# Altium PCB USB_keyholder.PcbDoc
Units mm, origin at the board's own origin, x right, y up, seen from the top; angles counter-clockwise.
Board outline 41.6 x 15.6 mm, 2 copper layers (Top Layer, Bottom Layer), stack 1.571 mm thick; 46 components, 41 nets, 205 pads, 36 vias.
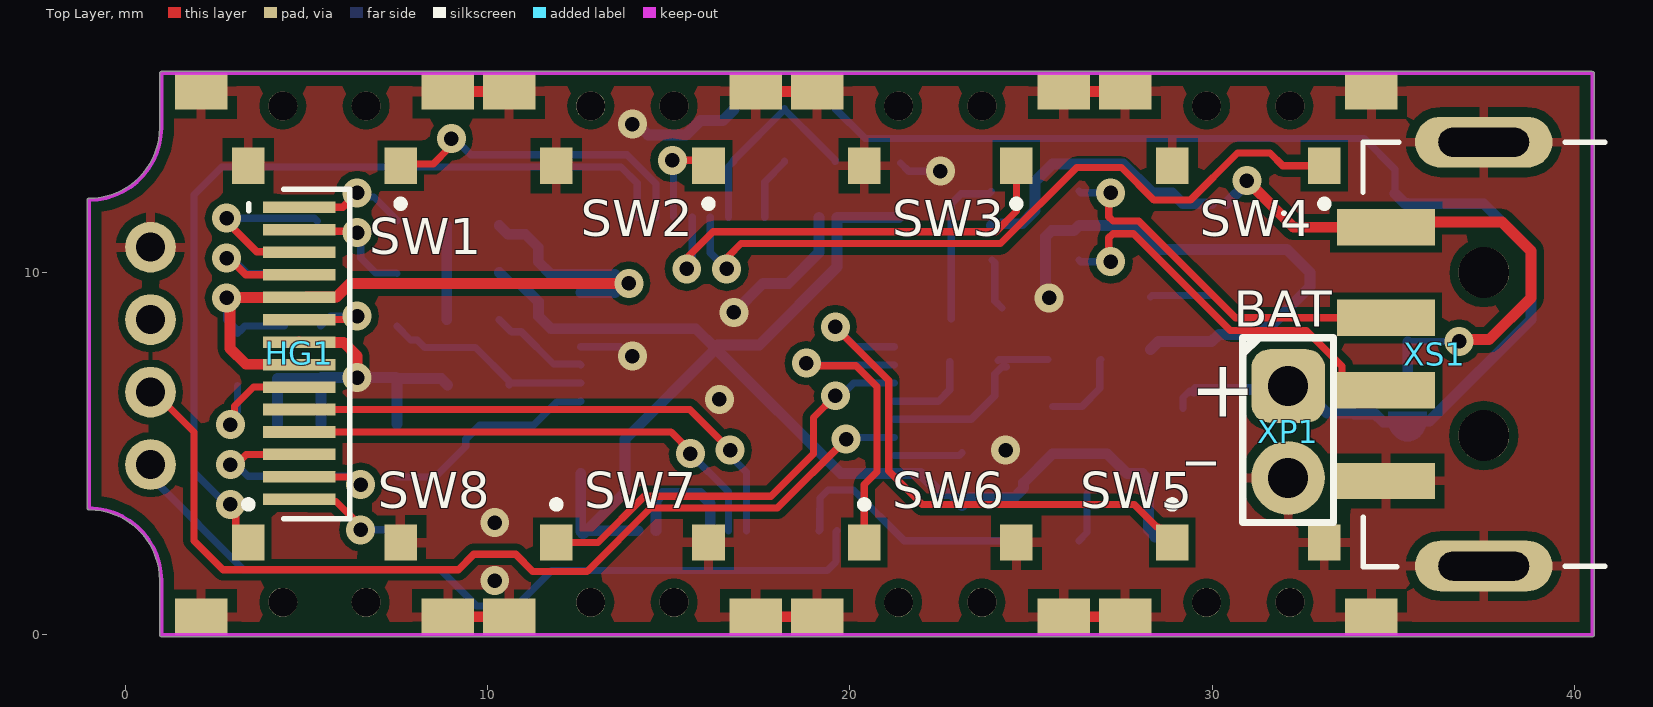
[diagram p0: Top Layer view]
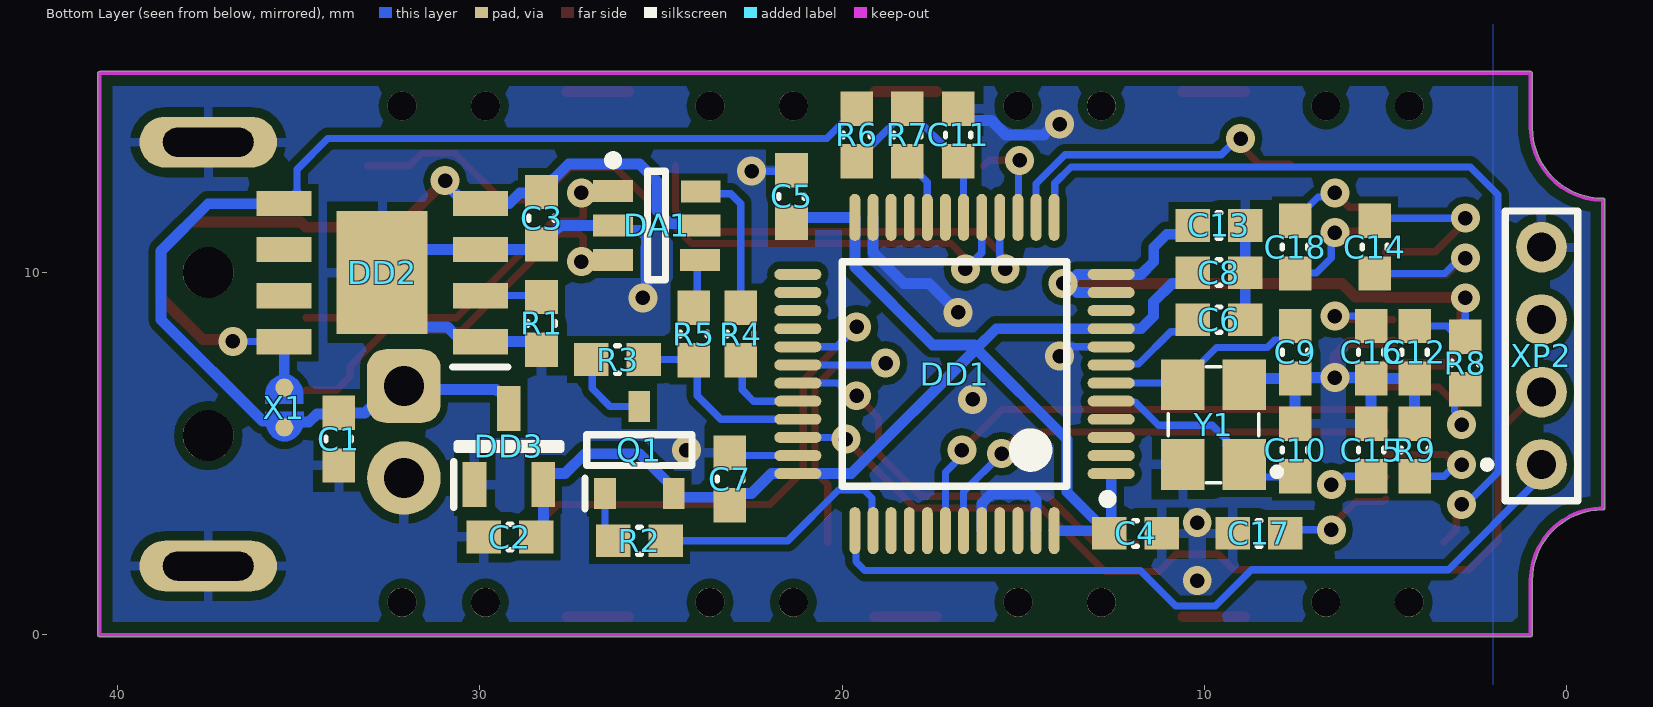
[diagram p1: Bottom Layer view, seen from below]
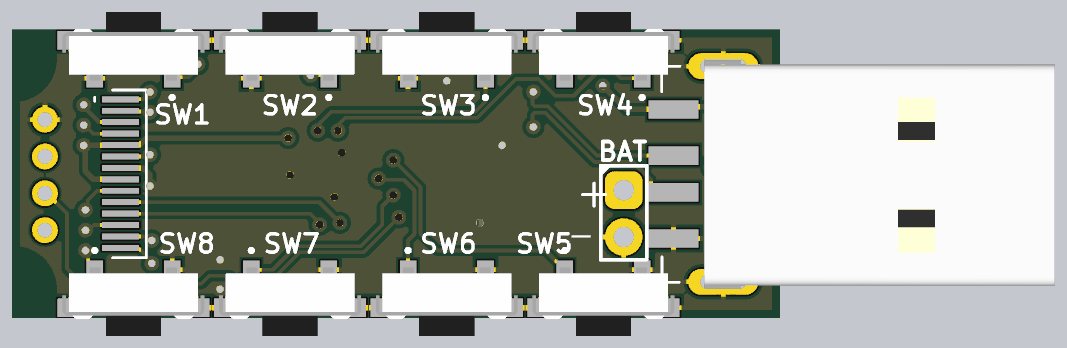
[diagram p2: 3D render of the assembled board from above, using the file's embedded part models]
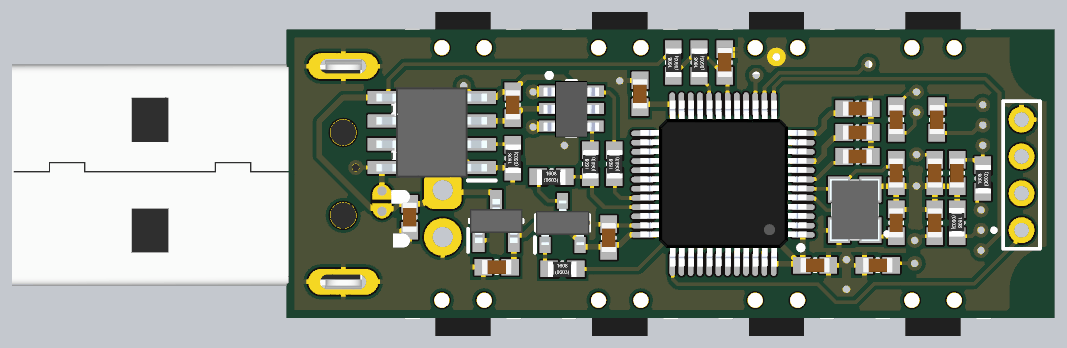
[diagram p3: 3D render of the assembled board from below, using the file's embedded part models]

## Layer stack, top to bottom
Top Solder: solder mask 0.0102, Solder Resist, Dk 3.5
Top Layer: signal copper 0.0356
Dielectric 1: dielectric 1.5, FR-4, Dk 4.8
Bottom Layer: signal copper 0.0356
Bottom Solder: solder mask 0.0102, Solder Resist, Dk 3.5

## Board outline
-0.999,3.45 cw(c-0.999,3.45) -0.999,3.45 cw(c-1,3.5) -1.036,3.464 cw(c-1,3.5) -1.05,3.501 -1.05,12 cw(c-1,12) -1,12.05 ccw(c-1,14) 0.95,14 0.95,15.5 cw(c1,15.5) 1.001,15.55 40.5,15.55 cw(c40.5,15.5) 40.55,15.5 40.55,0 cw(c40.5,0) 40.5,-0.05 1.002,-0.05 cw(c1,0) 0.95,0 0.95,1.5 ccw(c-1,1.5)

## Design rules (kind name [scope] priority, off if disabled: settings)
BoardOutlineClearance [All] p1: gap=0.4 ignorepadtopadclearanceinfootprint=FALSE
Clearance [All] p1: gap=0.2 ignorepadtopadclearanceinfootprint=FALSE except(0.125: Arc-Arc Arc-Track Arc-SMDPad Arc-THPad Arc-Via Arc-Text Track-Track Track-SMDPad Track-THPad Track-Via Track-Text SMDPad-Via SMDPad-Text THPad-THPad THPad-Via THPad-Text Via-Via Via-Text Fill-Text Poly-Text Region-Text Text-Text; 0.25: Arc-Hole Track-Hole SMDPad-Hole THPad-Hole Via-Hole Fill-Hole Poly-Hole Region-Hole Text-Hole)
ComponentClearance [All] p1: gap=0 collisioncheckmode=3 verticalgap=0.254 showdistances=FALSE
DiffPairsRouting [All] p1: maxlimit=0.254 minlimit=0.15 mostfreqgap=0.254 toplayer_minwidth=0.2 toplayer_maxwidth=0.381 toplayer_prefwidth=0.254 bottomlayer_minwidth=0.2 bottomlayer_maxwidth=0.381 bottomlayer_prefwidth=0.254 maxuncoupledlength=12.7
HoleSize [All] p1: absolutevalues=TRUE maxlimit=100 minlimit=0.3 maxpercent=80.000 minpercent=20.000
MinimumAnnularRing [All] p1: minimumring=0.15
MinimumSolderMaskSliver [All] p1: minsoldermaskwidth=0.15
PolygonConnect [All] p1: thpad.connectstyle=Relief thpad.reliefconductorwidth=0.254 thpad.reliefentries=4 thpad.polygonreliefangle="90 Angle" thpad.airgapwidth=0.254 smdpad.connectstyle=Relief smdpad.reliefconductorwidth=0.254 smdpad.reliefentries=4 smdpad.polygonreliefangle="90 Angle" smdpad.airgapwidth=0.254 via.connectstyle=Direct via.reliefconductorwidth=0.254 via.reliefentries=4 via.polygonreliefangle="90 Angle" via.airgapwidth=0.254
RoutingVias [All] p1: holewidth=0.4 width=0.8 viastyle="Through Hole" minholewidth=0.3 minwidth=0.8 maxholewidth=0.8 maxwidth=1.27
SilkToSilkClearance [All] p1 off: silktosilkclearance=0.15
SilkToSolderMaskClearance [IsPad] p1: minsilkscreentomaskgap=0.1 clearancetoexposedcopper=TRUE
SolderMaskExpansion [All] p1: expansion=0.102 istentingtop=FALSE
Width [All] p1: maxlimit=1 minlimit=0.125 preferedwidth=0.254
24 further rules are at their usual default settings.

## Classes and differential pairs
differential pair USB: +USB_P -USB_N
differential pair USB2: +USB2_P -USB2_N
differential pair USB1: +USB1_P -USB1_N

## Components (designator, comment, footprint, x,y, rotation, side; value= is the part's Value field where it differs from the comment)
C1 "1 мк" C_0603 33.9,5.4 r90 bottom value=1µF
C2 "1 мк" C_0603 29.175,2.7 r180 bottom value=1µF
C3 "0,1 мк" C_0603 28.3,11.5 r90 bottom value=0.1µF
C4 "0,1 мк" C_0603 11.9,2.8 r0 bottom value=0.1µF
C5 "0,1 мк" C_0603 21.4,12.1 r270 bottom value=0.1µF
C6 "0,1 мк" C_0603 9.6,8.7 r0 bottom value=0.1µF
C7 "0,1 мк" C_0603 23.1,4.3 r270 bottom value=0.1µF
C8 "0,1 мк" C_0603 9.6,10 r0 bottom value=0.1µF
C9 "20" C_0603 7.5,7.8 r90 bottom value=20pF
C10 "20" C_0603 7.5,5.1 r270 bottom value=20pF
C11 "10 мк" C_0603 16.8,13.8 r270 bottom value=10µF
C12 "0,1 мк" C_0603 4.2,7.8 r270 bottom value=0.1µF
C13 "0,1 мк" C_0603 9.6,11.3 r0 bottom value=0.1µF
C14 "1 мк" C_0603 5.3,10.7 r90 bottom value=1µF
C15 "10 мк" C_0603 5.4,5.1 r270 bottom value=10µF
C16 "1 мк" C_0603 5.4,7.8 r270 bottom value=1µF
C17 "10 мк" C_0603 8.5,2.8 r180 bottom value=10µF
C18 "1 мк" C_0603 7.5,10.7 r90 bottom value=1µF
DA1 "USBLC6-2SC6" SOT-23-6 25.1,11.3 r180 bottom
DD1 "STM32f103c8t6" LQFP48 16.9,7.2 r0 bottom
DD2 "TP4056" SOIC127P600X175-9N 32.7,10 r0 bottom
DD3 "MCP1700T-3002E_TT" SOT95P237X112-3N 29.2,5.2 r90 bottom
HG1 "SSD1306_128х64_OLED" 14_pin_OLED 4.8,11.8 r180 top
Q1 "MMBT5401-7-F" SOT95P240X120-3N 25.6,5.1 r90 bottom
R1 "10 к" R_0603 28.3,8.6 r90 bottom
R2 "1,5 к" R_0603 25.6,2.6 r180 bottom
R3 "1,5 к" R_0603 26.2,7.6 r180 bottom
R4 "22" R_0603 22.8,8.3 r90 bottom
R5 "22" R_0603 24.1,8.3 r90 bottom
R6 "1 M" R_0603 19.6,13.8 r90 bottom
R7 "1 M" R_0603 18.2,13.8 r90 bottom
R8 "10 к" R_0603 2.8,7.5 r90 bottom
R9 "390 к" R_0603 4.2,5.1 r270 bottom
SW1 "TSA365G00D" 1TS002G26003500CT 5.5,14 r180 top
SW2 "TSA365G00D" 1TS002G26003500CT 14,14 r180 top
SW3 "TSA365G00D" 1TS002G26003500CT 22.5,14 r180 top
SW4 "TSA365G00D" 1TS002G26003500CT 31,14 r180 top
SW5 "TSA365G00D" 1TS002G26003500CT 31,1.5 r0 top
SW6 "TSA365G00D" 1TS002G26003500CT 22.5,1.5 r0 top
SW7 "TSA365G00D" 1TS002G26003500CT 14,1.5 r0 top
SW8 "TSA365G00D" 1TS002G26003500CT 5.5,1.5 r0 top
X1 "Solder_jumper" Solder_jumper 35.4,6.3 r270 bottom
XP1 "BATTERY" PLS-2 32.1,5.6 r0 top
XP2 "PLS2-4" PLS2-4 0.7,4.7 r90 bottom
XS1 "DS1098-WN0" DS1098-WN0 37.5,1.9 r90 top
Y1 "X322512MSB4SI" X322512MSB4SI 9.75,5.8 r90 bottom

## Footprints (in the part's own frame and the unit in brackets; to place one, negate y for a bottom-side part, rotate by r counter-clockwise, add the part's x,y. Pads: shape width x height; smd on the part's side, far side on the other; paste and mask are expansions set on the pad)
1TS002G26003500CT [mm]
  rect 0.9x1 smd: 1(-2.1,1.05) 2(2.1,1.05)
  rect 1.45x1 smd: 3(-3.4,-1) 4(3.4,-1)
  round 0.8 hole 0.8 mask+0.1: MH1(-1.15,-0.6) MH2(1.15,-0.6)
  silkscreen extent -2.2,2 -2,2.2, body extent -3.85,-2.54 3.85,1.19, height 3.51
14_pin_OLED [mm]
  rect 2x0.32 smd: 1(0,0) 2(0,0.62) 3(0,1.24) 4(0,1.86) 5(0,2.48) 6(0,3.1) 7(0,3.72) 8(0,4.34) 9(0,4.96) 10(0,5.58) 11(0,6.2) 12(0,6.82) 13(0,7.44) 14(0,8.06)
  silkscreen extent -1.4,-0.5 1.39,8.6
C_0603 [mm] "Chip Resistor, 2-Leads, Body 1.60x0.80mm, IPC Medium Density"
  rect 0.95x0.9 smd: 1(-0.725,0) 2(0.725,0)
  silkscreen extent -0.05,-0.35 0.05,0.35, body extent -0.8,-0.4 0.8,0.4, height 0.8
DS1098-WN0 [mm]
  rrect100% 1.4x3.8 hole 2.5 slot 0.8 at 0 deg: 0(0,0) 0(11.7,0)
  rect 1x2.7 smd: 1(9.35,2.7) 2(6.85,2.7) 3(4.85,2.7) 4(2.35,2.7)
  rrect100% 1.4x1.4 hole 1.4: -(3.6,0) -(8.1,0)
  silkscreen extent -0.03,-3.34 11.7,3.33, body extent -0.43,-17.98 12,3.63, height 2.7
LQFP48 [mm] "TSQFP, 48-Leads, Body 7,00x7,00mm, Pitch 0,50mm, IPC Medium Density"
  oval 1.3x0.3 smd: 1(-4.325,2.75) 2(-4.325,2.25) 3(-4.325,1.75) 4(-4.325,1.25) 5(-4.325,0.75) 6(-4.325,0.25) 7(-4.325,-0.25) 8(-4.325,-0.75) 9(-4.325,-1.25) 10(-4.325,-1.75) 11(-4.325,-2.25) 12(-4.325,-2.75) 25(4.325,-2.75) 26(4.325,-2.25) 27(4.325,-1.75) 28(4.325,-1.25) 29(4.325,-0.75) 30(4.325,-0.25) 31(4.325,0.25) 32(4.325,0.75) 33(4.325,1.25) 34(4.325,1.75) 35(4.325,2.25) 36(4.325,2.75)
  oval 0.3x1.3 smd: 13(-2.75,-4.325) 14(-2.25,-4.325) 15(-1.75,-4.325) 16(-1.25,-4.325) 17(-0.75,-4.325) 18(-0.25,-4.325) 19(0.25,-4.325) 20(0.75,-4.325) 21(1.25,-4.325) 22(1.75,-4.325) 23(2.25,-4.325) 24(2.75,-4.325) 37(2.75,4.325) 38(2.25,4.325) 39(1.75,4.325) 40(1.25,4.325) 41(0.75,4.325) 42(0.25,4.325) 43(-0.25,4.325) 44(-0.75,4.325) 45(-1.25,4.325) 46(-1.75,4.325) 47(-2.25,4.325) 48(-2.75,4.325)
  silkscreen extent -4.35,-3.1 3.1,3.57, body extent -4.53,-4.52 4.47,4.48, height 1.5
PLS2-4 [mm]
  round 1.4 hole 0.8: 1(0,0) 2(2,0) 3(4,0) 4(6,0)
  silkscreen extent -1,-1 7,1.6, body extent -1,-1 7,1, height 0.25
PLS-2 [mil] "PLS-2 вилка штыревая 2.54мм 1x2 прямая"
  rrect50% 80x80 hole 43.31: 1(0,50)
  round 80 hole 43.31: 2(0,-50)
  silkscreen extent -49,-98 49,102, body extent -49,-100 49,100, height 10
R_0603 [mm] "Chip Resistor, 2-Leads, Body 1.60x0.80mm, IPC Medium Density"
  rect 0.95x0.9 smd: 1(-0.725,0) 2(0.725,0)
  silkscreen extent -0.05,-0.38 0.05,0.38, body extent -0.8,-0.45 0.75,0.4, height 0.45
SOIC127P600X175-9N [mm]
  rect 1.525x0.7 smd: 1(-2.712,1.905) 2(-2.712,0.635) 3(-2.712,-0.635) 4(-2.712,-1.905) 5(2.712,-1.905) 6(2.712,-0.635) 7(2.712,0.635) 8(2.712,1.905)
  rect 2.513x3.402 smd: 9(0,0)
  silkscreen extent -3.47,2.61 -1.95,2.61, body extent -3,-2.45 3,2.45, height 1.75
Solder_jumper [mm]
  rrect100% 0.5x0.5 smd: 1(-0.525,0) 2(0.575,0)
  Top Layer region: -0.075,0.525 -0.3,0.525 -0.518,0.497 -0.709,0.387 -0.843,0.212 -0.9,0 -0.9,0 -0.837,-0.216 -0.696,-0.392 -0.499,-0.5 -0.275,-0.525 -0.275,-0.525 -0.075,-0.525
  Top Layer region: 0.144,-0.519 0.369,-0.519 0.587,-0.491 0.777,-0.381 0.911,-0.207 0.969,0.006 0.969,0.006 0.906,0.222 0.765,0.398 0.567,0.506 0.344,0.531 0.344,0.531 0.144,0.531
SOT95P237X112-3N [mm]
  rect 1.25x0.65 smd: 1(-1.05,0.95) 2(-1.05,-0.95) 3(1.05,0)
  silkscreen extent -1.68,-1.43 0.08,1.53, body extent -1.18,-1.43 1.18,1.43, height 1.12
SOT95P240X120-3N [mm]
  rect 0.85x0.6 smd: 1(-1.2,0.95) 2(-1.2,-0.95) 3(1.2,0)
  silkscreen extent -1.63,-1.45 0.43,1.5, body extent -1.2,-1.45 1.2,1.45, height 1.2
SOT-23-6 [mm] "SOT23, 6-Leads, Body 1,60x1,60mm, Pitch 0,50mm, IPC Medium Density"
  rect 1.1x0.6 smd: 1(-1.225,0.95) 2(-1.225,0) 3(-1.225,-0.95) 4(1.175,-0.95) 5(1.194,0) 6(1.194,0.94)
  silkscreen extent -1.35,-1.5 0.22,1.92, body extent -1.52,-1.56 1.48,1.49, height 1.4
X322512MSB4SI [mm]
  rect 1.4x1.2 smd: 1(-1.1,-0.85) 2(1.1,-0.85) 3(1.1,0.85) 4(-1.1,0.85)
  silkscreen extent -1.6,-1.8 1.6,1.25, body extent -1.68,-1.33 1.68,1.33, height 0.9

## Part data
C1 C2 C14 C16 C18: library part GRM188R61E225MA12D, "CAP CER 2.2UF 25V X5R 0603", LCSC Part #=C15849, Manufacturer="Murata Electronics", Component Type=Capasitor, ComponentLink1Description=Datasheet, ComponentLink1URL=https://search.murata.co.jp/Ceramy/image/img/A01X/G101/ENG/GRM188R61E225MA12-01.pdf, Part Number=GRM188R61E225MA12D
C3 C4 C5 C6 C7 C8 C12 C13: library part GRM188R72A104MA35D, "CAP CER 0.1UF 100V X7R 0603", LCSC Part #=C14663, Manufacturer="Murata Electronics", Component Type=Capasitor, ComponentLink1Description=Datasheet, ComponentLink1URL=https://search.murata.co.jp/Ceramy/image/img/A01X/G101/ENG/GRM188R72A104MA35-01.pdf, Part Number=GRM188R72A104MA35D
C9 C10: library part GRM1885C1H100FA01D, "CAP CER 10PF 50V C0G/NP0 0603", LCSC Part #=C1648, Manufacturer="Murata Electronics", Component Type=Capasitor, ComponentLink1Description=Datasheet, ComponentLink1URL=https://www.murata.com/~/media/webrenewal/support/library/catalog/products/capacitor/mlcc/c02e.ashx?la=en-us, Part Number=GRM1885C1H100FA01D
C11 C15 C17: library part GRM188R61A106KE69J, "CAP CER 10UF 10V X5R 0603", LCSC Part #=C19702, Manufacturer="Murata Electronics", Component Type=Capasitor, ComponentLink1Description=Datasheet, ComponentLink1URL=https://search.murata.co.jp/Ceramy/image/img/A01X/G101/ENG/GRM188R61A106KE69-01.pdf, Part Number=GRM188R61A106KE69J
DD2: "Li Ion charger", LCSC Part #=C16581
DD3: LCSC Part #=C62244
Q1: "Transistor BJT PNP", LCSC Part #=C8326, Manufacturer_Name="Diodes Inc.", Mouser Part Number=621-MMBT5401-F, Arrow Part Number=MMBT5401-7-F, Arrow Price/Stock=https://www.arrow.com/en/products/mmbt5401-7-f/diodes-incorporated?region=nac, Datasheet Link=https://www.diodes.com/assets/Datasheets/ds30057.pdf, Height=1.2mm, Manufacturer_Part_Number=MMBT5401-7-F, Mouser Price/Stock=https://www.mouser.co.uk/ProductDetail/Diodes-Incorporated/MMBT5401-7-F?qs=i73nB8jq7%2FziVmdJmjed1Q%3D%3D
R1 R8: library part CR0603-FX-1002ELF, "RES SMD 10K OHM 1% 1/10W 0603", LCSC Part #=C25804, Manufacturer="Bourns Inc.", Component Type=Resistor, ComponentLink1Description=Datasheet, ComponentLink1URL=https://www.bourns.com/pdfs/chpreztr.pdf, Part Number=CR0603-FX-1002ELF
R2 R3: library part CR0603-FX-1501ELF, "RES SMD 1.5K OHM 1% 1/10W 0603", LCSC Part #=C22843, Manufacturer="Bourns Inc.", Component Type=Resistor, ComponentLink1Description=Datasheet, ComponentLink1URL=https://www.bourns.com/pdfs/chpreztr.pdf, Part Number=CR0603-FX-1501ELF
R4 R5: library part CR0603-FX-22R0ELF, "RES SMD 22 OHM 1% 1/10W 0603", LCSC Part #=C23345, Manufacturer="Bourns Inc.", Component Type=Resistor, ComponentLink1Description=Datasheet, ComponentLink1URL=https://www.bourns.com/pdfs/chpreztr.pdf, Part Number=CR0603-FX-22R0ELF
R6 R7: library part CR0603-FX-1004ELF, "RES SMD 1M OHM 1% 1/10W 0603", LCSC Part #=C22935, Manufacturer="Bourns Inc.", Component Type=Resistor, ComponentLink1Description=Datasheet, ComponentLink1URL=https://www.bourns.com/pdfs/chpreztr.pdf, Part Number=CR0603-FX-1004ELF
R9: library part CR0603-FX-3903ELF, "RES SMD 390K OHM 1% 1/10W 0603", LCSC Part #=C23150, Manufacturer="Bourns Inc.", Component Type=Resistor, ComponentLink1Description=Datasheet, ComponentLink1URL=https://www.bourns.com/pdfs/chpreztr.pdf, Part Number=CR0603-FX-3903ELF
XP1: library part PLS-2
Y1: "8MHz Crystal resonator", LCSC Part #=C9002
DA1: HelpURL=https://static.chipdip.ru/lib/093/DOC001093117.pdf

## Via types
v1: diameter 0.8, hole 0.4, Top Layer to Bottom Layer, tented both sides, 35 vias
v2: diameter 0.8, hole 0.4, Top Layer to Bottom Layer, 1 vias

## Nets (pads, with @x,y where several pads share a name; then routed paths per layer and width w, separated by ;. In a path a pad name is that pad's centre, name@x,y a point inside that pad or via, vN(x,y) a via of type N, cw(c..) or ccw(c..) an arc to the next point about the centre after c; other vN are vias at no path point)
3V0: C2.2 C4.2 C5.2 C7.2 C8.2 DD1.1 DD1.9 DD1.24 DD1.36 DD1.48 DD3.2 Q1.2 | length 40.5
  Bottom Layer w0.3: C8.2 10.625,9.7 10.9,9.7 11.406,9.194 11.406,8.794 11.75,8.45 DD1.9 15.75,8.45 16.3,7.9 ; DD1.1 12.575,2.875 12.575,2.85 C4.2 12.65,2.8 C4.2@12.725,2.875 ; DD1.48 C4.2@12.725,2.875 ; 16.35,7.95 13.8,5.4 13.8,3.95 C4.2@12.725,2.875 ; C5.2@21.35,11.525 DD1.24 19.65,10.15 17.5,8 16.35,8 16.35,7.85 19.75,4.45 21.95,4.45 22.5,3.9 22.8,3.9 23.1,3.6 C7.2 23.325,3.8 Q1.2@24.55,3.8 ; Q1.2 24.8,4.05 24.8,4.2 25.6,5 27.1,5 27.651,4.449 28.075,4.449 28.25,4.274 28.25,2.9 C2.2 C2.2@28.425,2.7
3V0_OLED: C12.1 C13.2 DD1.11 DD1.12 HG1.5 HG1.8 R8.2 | length 23.4
  Top Layer w0.3: HG1.8@5,7.46 4.99,7.47 3.33,7.47 2.896,7.904 2.896,9.204 v1(2.8,9.3) 2.81,9.31 4.99,9.31 5.01,9.33 5.83,9.33 6.2,9.7 v1(13.9,9.7)
  Bottom Layer w0.2: v1(2.8,9.3) 2.8,8.7 3.075,8.425 R8.2@3.2,8.425 ; R8.2@3.1,8.325 R8.2@3.2,8.425 ; C12.1@4.4,8.525 3.3,8.525 R8.2@3.2,8.425
  Bottom Layer w0.3: C13.2 10.568,11.057 11.043,11.057 11.4,10.7 11.4,10.3 11.75,9.95 13.515,9.95 v1@13.765,9.7 ; DD1.11 13.515,9.45 v1@13.765,9.7 ; v1@13.765,9.7 v1(13.9,9.7) v1@13.765,9.7
5V_USB: C3.2 DA1.5 DD2.4 DD2.8 X1.1 XS1.1 | length 23.8
  Top Layer w0.3: v1(30.962,12.538) 32.25,11.25 XS1.1 34.95,11.4 38,11.4 38.8,10.6 38.8,9.3 37.648,8.148 36.869,8.148 v1(36.821,8.1)
  Bottom Layer w0.2: X1.1 X1.1@35.412,6.837 ; DD2.8@35.4,8.083 DD2.8 35.415,8.097 36.819,8.097 v1(36.821,8.1)
  Bottom Layer w0.3: DA1.5 23.956,11.349 24.749,11.349 25.116,11.716 25.116,12.516 25.6,13 27.55,13 28.3,12.25 C3.2 28.325,12.2 28.9,12.2 29.2,11.9 29.983,11.9 DD2.4 ; DD2.4@30.4,11.905 30.962,12.467 v1(30.962,12.538) ; X1.1 DD2.8@35.4,8.083
GND: C1.1 C2.1 C3.1 C4.1 C5.1 C6.1 C7.1 C8.1 C9.1 C10.1 C11.1 C12.2 C13.1 C15.1 C16.2 C17.1 DA1.2 DD1.8 DD1.23 DD1.35 DD1.44 DD1.47 DD2.1 DD2.3 DD2.9 DD3.1 HG1.7 R1.1 R9.1 SW1.2 SW1.3 SW1.4 SW2.2 SW2.3 SW2.4 SW3.2 SW3.3 SW3.4 SW4.2 SW4.3 SW4.4 SW5.2 SW5.3 SW5.4 SW6.2 SW6.3 SW6.4 SW7.2 SW7.3 SW7.4 SW8.2 SW8.3 SW8.4 XP1.2 XP2.4 XS1.0 XS1.4 Y1.2 Y1.4 | length 54.1
  Top Layer w0.3: HG1.7 4.81,8.07 6.03,8.07 6.399,7.701 6.399,7.101 v1(6.4,7.1) ; SW8.4 SW7.3 ; SW1.3 SW2.4 ; SW7.4 SW6.3 ; SW2.3 SW3.4 ; SW6.4 SW5.3 ; SW3.3 SW4.4
  Bottom Layer w0.2: DD1.8 13.655,7.95 13.909,7.696 v1(14,7.696) ; DD1.35 23.025,4.95 C7.1 ; C5.1@21.4,13.025 21.625,12.8 v1(22.5,12.8)
  Bottom Layer w0.3: R9.1 C12.2 C16.2 ; C15.1 C16.2 ; C10.1 C9.1 ; C6.1 C8.1 C13.1 ; Y1.2 8.725,7.075 C9.1 ; v2(14,14.1) 14.135,14.1 14.435,13.8 15.481,13.8 15.881,14.2 16.5,14.2 16.8,14.5 C11.1 ; DD1.47 14.65,3.724 14.826,3.9 15.874,3.9 16.15,3.624 DD1.44 ; v1(16.8,8.9) 17.6,9.7 18.3,9.7 19.15,10.55 DD1.23 ; v1(25.5,9.3) 25.5,9.435 25.4,9.535 25.4,10.988 25.576,11.163 26.189,11.163 DA1.2 27.775,11.3 27.975,11.1 28,11.1 28.3,10.8 C3.1 28.44,10.635 DD2.3 32.065,10.635 DD2.9 32.7,9.607 31.594,8.5 30.9,8.5 30.695,8.295 30.188,8.295 DD2.1 28.52,8.095 R1.1 ; C16.2 5.425,7.1 v1(6.4,7.1) 7.475,7.1 C9.1
  other v1: 10.2,1.5 10.2,3.1 24.3,5.1 16.4,6.5
MCU_VBAT: C11.2 DD1.18 R6.1 R7.2 | length 5.6
  Bottom Layer w0.2: DD1.18 16.65,12.925 C11.2 16.8,13.1 R7.2@18.2,14.5 ; R7.2 R7.2@18.2,14.5 ; R6.1 19.6,13.1 19.225,13.475 R7.2@18.2,14.5
NetC6_2: C6.2 DD1.7 | length 2.8
  Bottom Layer w0.2: C6.2 10.659,8.366 10.934,8.366 11.821,7.479 12.546,7.479 DD1.7
NetC9_2: C9.2 DD1.6 Y1.3 | length 5.8
  Bottom Layer w0.2: C9.2 7.5,8.516 7.875,8.141 8.059,8.141 8.269,7.931 9.669,7.931 10.6,7 Y1.3 10.65,6.95 DD1.6
NetC10_2: C10.2 DD1.5 Y1.1 | length 6.1
  Bottom Layer w0.2: C10.2 7.517,4.358 8.558,4.358 9.4,5.2 9.4,5.4 9.783,5.783 11.272,5.783 11.919,6.431 12.556,6.431 DD1.5
NetC14_1: C14.1 HG1.4 | length 5.1
  Top Layer w0.2: v1(2.8,10.4) 2.87,10.4 3.33,9.94 HG1.4@5,9.94
  Bottom Layer w0.2: v1(2.8,10.4) 2.94,10.4 3.365,9.975 C14.1
NetC14_2: C14.2 HG1.3 | length 5.2
  Top Layer w0.2: v1(2.8,11.5) 2.8,11.4 3.628,10.572 4.988,10.572 HG1.3@5,10.56
  Bottom Layer w0.2: v1(2.8,11.5) 5.225,11.5 C14.2
NetC15_2: C15.2 HG1.13 | length 2.8
  Top Layer w0.2: HG1.13@5,4.36 6.2,4.36 6.413,4.147 v1(6.496,4.147)
  Bottom Layer w0.2: C15.2 6.105,4.375 6.334,4.147 v1(6.496,4.147)
NetC16_1: C16.1 HG1.6 | length 2.8
  Top Layer w0.2: HG1.6 4.801,8.701 6.301,8.701 v1(6.4,8.8)
  Bottom Layer w0.2: C16.1 5.675,8.8 v1(6.4,8.8)
NetC17_2: C17.2 HG1.14 | length 3.3
  Top Layer w0.2: HG1.14@5,3.74 5.06,3.68 5.82,3.68 6.5,3 v1(6.5,2.9)
  Bottom Layer w0.2: v1(6.5,2.9) 7.828,2.9 C17.2@7.875,2.853
NetC18_1: C18.1 HG1.2 | length 3.4
  Top Layer w0.2: HG1.2@5,11.18 5.04,11.14 6.36,11.14 v1(6.4,11.1)
  Bottom Layer w0.2: v1(6.4,11.1) 6.5,11 6.5,10.4 6.913,9.987 7.488,9.987 C18.1
NetC18_2: C18.2 HG1.1 | length 3
  Top Layer w0.2: HG1.1@5,11.8 6.008,11.8 6.4,12.192 v1(6.4,12.2)
  Bottom Layer w0.2: v1(6.4,12.2) 6.515,12.085 6.865,12.085 7.5,11.45 C18.2
NetDD2_2: DD2.2 R1.2 | length 1.7
  Bottom Layer w0.2: R1.2 28.34,9.365 DD2.2
NetHG1_9: HG1.9 R8.1 | length 3.9
  Top Layer w0.2: v1(2.9,5.8) 3.015,5.915 3.015,6.315 3.54,6.84 HG1.9@5,6.84
  Bottom Layer w0.2: v1(2.9,5.8) 2.9,5.962 3.1,6.162 R8.1@3.1,6.875
NetHG1_12: HG1.12 R9.2 | length 3.9
  Top Layer w0.2: v1(2.9,4.7) 3.062,4.7 3.342,4.98 HG1.12@5,4.98
  Bottom Layer w0.2: v1(2.9,4.7) 3.062,4.7 3.387,4.375 R9.2@4.4,4.375
NetQ1_1: Q1.1 R2.1 | length 1.4
  Bottom Layer w0.2: R2.1 26.55,2.825 Q1.1
NetQ1_3: Q1.3 R3.1 | length 2.3
  Bottom Layer w0.2: Q1.3 26.4,6.3 26.9,6.8 26.9,7.575 R3.1
SCL_OLED: DD1.42 HG1.10 | length 14.6
  Top Layer w0.2: HG1.10@5,6.22 15.58,6.22 v1(16.7,5.1)
  Bottom Layer w0.2: v1(16.7,5.1) 16.7,4.938 17.15,4.488 DD1.42
SDA_OLED: DD1.43 HG1.11 | length 13.4
  Top Layer w0.2: HG1.11@5,5.6 15.069,5.6 15.6,5.069 v1(15.6,5)
  Bottom Layer w0.2: v1(15.6,5) 16.65,3.95 DD1.43
SW1: DD1.29 SW5.1 | length 15.1
  Top Layer w0.2: v1(19.6,8.5) 21.077,7.023 21.077,4.523 22,3.6 27.85,3.6 28.475,2.975 28.525,2.975 28.9,2.6 SW5.1
  Bottom Layer w0.2: v1(19.6,8.5) 20.15,7.95 DD1.29
SW2: DD1.30 SW6.1 | length 9.1
  Top Layer w0.2: v1(18.8,7.5) 18.869,7.431 20.169,7.431 20.75,6.85 20.75,4.5 20.4,4.15 SW6.1
  Bottom Layer w0.2: v1(18.8,7.5) 18.85,7.45 DD1.30
SW3: DD1.31 SW7.1 | length 11.7
  Top Layer w0.2: SW7.1 13.05,2.55 14.325,3.825 17.825,3.825 19,5 19,6 v1(19.6,6.6)
  Bottom Layer w0.2: v1(19.6,6.6) 19.762,6.6 20.112,6.95 DD1.31
SW4: DD1.13 SW8.1 | length 24
  Top Layer w0.2: v1(2.9,3.6) 2.9,3.438 3.05,3.288 3.05,2.9 SW8.1
  Bottom Layer w0.2: v1(2.9,3.6) 2.791,3.6 1.9,4.491 1.9,12.15 2.667,12.917 13.683,12.917 14.131,12.469 14.131,11.544 DD1.13
SW5: DD1.14 SW1.1 | length 8.9
  Top Layer w0.2: SW1.1 7.65,13 8.5,13 8.923,13.423 8.923,13.623 v1(9,13.7)
  Bottom Layer w0.2: v1(9,13.7) 9.09,13.7 9.54,13.25 13.85,13.25 14.65,12.45 DD1.14
SW6: DD1.15 SW2.1 | length 2.7
  Top Layer w0.2: v1(15.1,13.1) 15.95,13.1 SW2.1
  Bottom Layer w0.2: v1(15.1,13.1) 15.131,13.069 15.131,11.544 DD1.15
SW7: DD1.16 SW3.1 | length 12.7
  Top Layer w0.2: v1(15.5,10.1) 15.571,10.171 15.571,10.471 16.227,11.127 24.027,11.127 24.6,11.7 SW3.1
  Bottom Layer w0.2: v1(15.5,10.1) 15.5,10.222 15.65,10.372 DD1.16
SW8: DD1.17 SW4.1 | length 20.5
  Top Layer w0.2: v1(16.6,10.1) 16.671,10.171 16.671,10.471 17,10.8 24.162,10.8 26.262,12.9 27.5,12.9 28.4,12 29.4,12 30.7,13.3 31.6,13.3 31.95,12.95 SW4.1
  Bottom Layer w0.2: DD1.17 16.15,10.55 v1(16.6,10.1)
SWD_CLK: DD1.37 XP2.1 | length 21.9
  Bottom Layer w0.2: XP2.1@0.816,4.566 0.8,4.55 0.8,4.266 3.266,1.8 8.7,1.8 9.706,0.794 10.794,0.794 11.775,1.775 19.375,1.775 19.621,2.021 19.621,2.846 DD1.37
SWD_IO: DD1.34 XP2.2 | length 26.3
  Top Layer w0.2: XP2.2@0.697,6.803 1.9,5.6 1.9,2.6 2.7,1.8 9.2,1.8 9.623,2.223 10.777,2.223 11.25,1.75 12.75,1.75 14.5,3.5 18,3.5 v1(19.9,5.4)
  Bottom Layer w0.2: v1(19.9,5.4) 19.95,5.45 DD1.34
USB1_EN: DD1.38 R2.2 | length 7.3
  Bottom Layer w0.2: DD1.38 19.169,2.894 19.169,3.465 19.179,3.474 19.179,3.779 19.4,4 20.1,4 21.5,2.6 R2.2
USB1_N: DD1.32 R4.1 | length 2.4
  Bottom Layer w0.2: DD1.32 22.45,6.45 22.763,6.763 R4.1@22.763,7.538
USB1_P: DD1.33 R3.2 R5.1 | length 5.4
  Bottom Layer w0.2: DD1.33 23.35,5.95 24,6.6 24,7.2 24.2,7.4 R5.1@24.325,7.4 ; R5.1 24.125,7.6 R3.2
USB2_N: DA1.6 R4.2 | length 4.4
  Bottom Layer w0.2: R4.2@22.8,8.725 22.8,11.9 23.073,12.173 23.84,12.173 DA1.6
USB2_P: DA1.4 R5.2 | length 1.4
  Bottom Layer w0.2: DA1.4 24,10.275 24,9.225 R5.2@24.2,9.025
USB_N: DA1.1 XS1.2 | length 10.4
  Top Layer w0.2: v1(27.2,12.2) 27.15,12.15 27.15,11.542 27.267,11.425 27.975,11.425 30.65,8.75 XS1.2
  Bottom Layer w0.2: DA1.1 26.375,12.2 v1(27.2,12.2)
USB_P: DA1.3 XS1.3 | length 11.2
  Top Layer w0.2: v1(27.2,10.3) 27.15,10.35 27.15,10.958 27.267,11.075 27.83,11.075 30.505,8.4 32.6,8.4 33.585,7.415 33.585,7.125 33.96,6.75 XS1.3
  Bottom Layer w0.2: DA1.3 26.375,10.3 v1(27.2,10.3)
VBAT: C1.2 DD2.5 DD3.3 R6.2 X1.2 XP1.1 | length 34.6
  Bottom Layer w0.2: R6.2 20.425,13.7 34.2,13.7 35.046,12.854 DD2.5@35.046,12.18 ; DD3.3 29.2,6.55 29.375,6.725 DD3.3@29.506,6.725 ; XP1.1 XP1.1@32.43,6.87 ; C1.2 C1.2@33.925,6.1 ; 34.974,5.874 35,5.9
  Bottom Layer w0.3: DD3.3@29.506,6.725 29.551,6.77 XP1.1@32.1,6.77 ; XP1.1@32.43,6.87 33.175,6.125 C1.2 ; C1.2@33.925,6.1 34.5,6.1 34.726,5.874 34.974,5.874 ; DD2.5@35.046,12.18 35.321,11.905 DD2.5 35.417,11.9 37.5,11.9 38.8,10.6 38.8,8.7 36,5.9 35.578,5.9 X1.2@35.378,5.7 ; X1.2@35.222,5.9 35.397,5.725 X1.2
VBAT_EN: DD1.20 R7.1 | length 1.8
  Bottom Layer w0.2: DD1.20 17.65,12.5 18.2,13.05 R7.1
pads on no net: DD1.2 DD1.3 DD1.4 DD1.10 DD1.19 DD1.21 DD1.22 DD1.25 DD1.26 DD1.27 DD1.28 DD1.39 DD1.40 DD1.41 DD1.45 DD1.46 DD2.6 DD2.7 SW1.MH1 SW1.MH2 SW2.MH1 SW2.MH2 SW3.MH1 SW3.MH2 SW4.MH1 SW4.MH2 SW5.MH1 SW5.MH2 SW6.MH1 SW6.MH2 SW7.MH1 SW7.MH2 SW8.MH1 SW8.MH2 XP2.3 XS1.-

## Polygon pours and split planes (outlines as drawn)
GND on Bottom Layer "NONET_L-01_P-002" (solid, pour order 5): -6.4,17.821 59.132,17.821 59.132,-5.42 -6.4,-5.42
GND on Bottom Layer "NONET_L-01_P-001" (solid, shelved, pour order 4): 2.034,21.7 67.566,21.7 67.566,-1.541 2.034,-1.541
GND on Top Layer "NONET_L-01_P-001" (solid, pour order 2): -8.3,17.5 57.232,17.5 57.232,-5.741 -8.3,-5.741

## Keep-outs
Keep-Out Layer:
  lines w0.1: -1,3.5 cw(c-1,1.5) 1,1.5 1,0 40.5,0 40.5,15.5 1,15.5 1,14 cw(c-1,14) -1,12 -1,3.5 ; -1,3.5 -1,3.5

## Silkscreen, mask and mechanical layers (free items; w line width, h text height)
Top Overlay:
  lines w0.15: 31.977,11.643 31.988,11.643
  text "BAT" at 30.6,8.5 h1
  text "+" at 29.38,6.013 h1.6
  text "_" at 29.3,4.655 h2